# Altium PCB 32X35雷达微动底板V0.3.PcbDoc
Units mil, origin at the board's own origin, x right, y up, seen from the top; angles counter-clockwise.
Board outline 1258.74 x 1380 mil, 2 copper layers (Top Layer, Bottom Layer); 55 components, 39 nets, 182 pads, 44 vias.
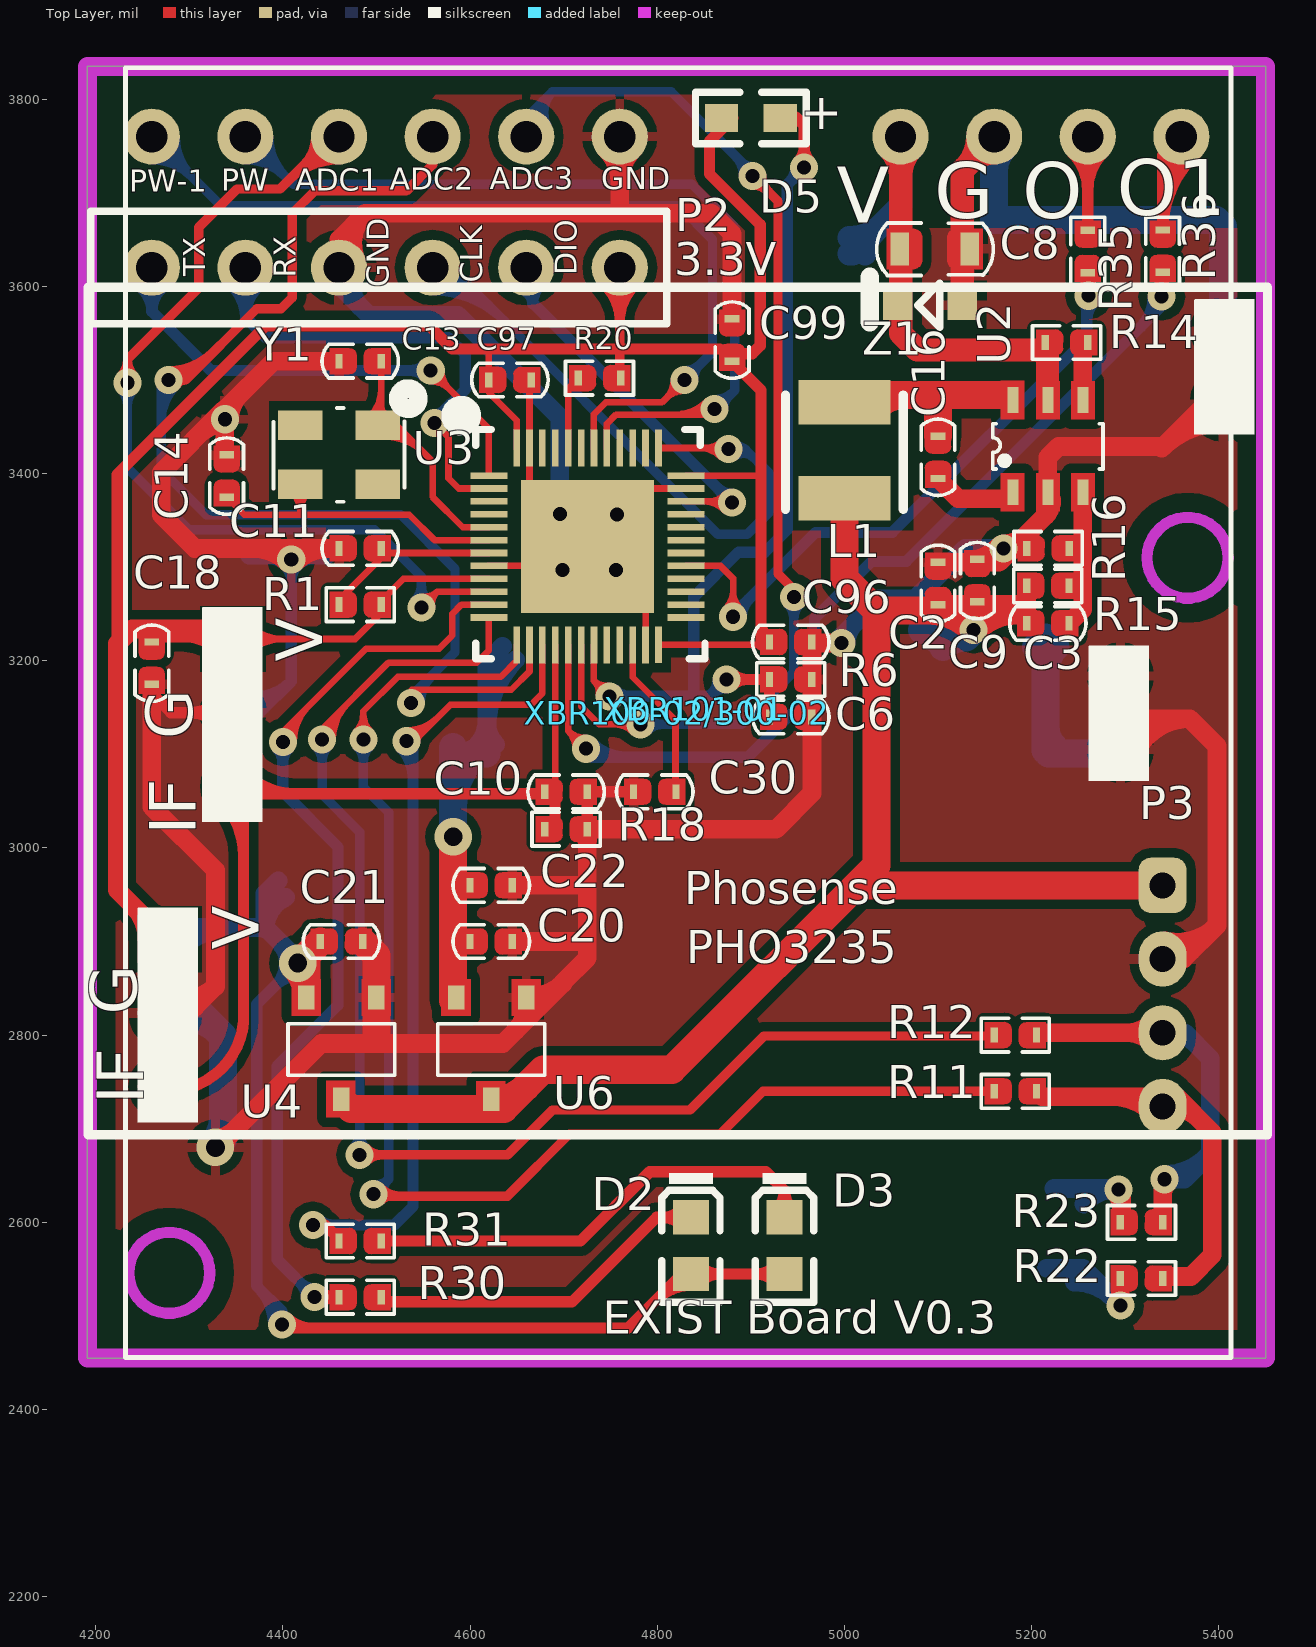
[diagram p0: Top Layer view]
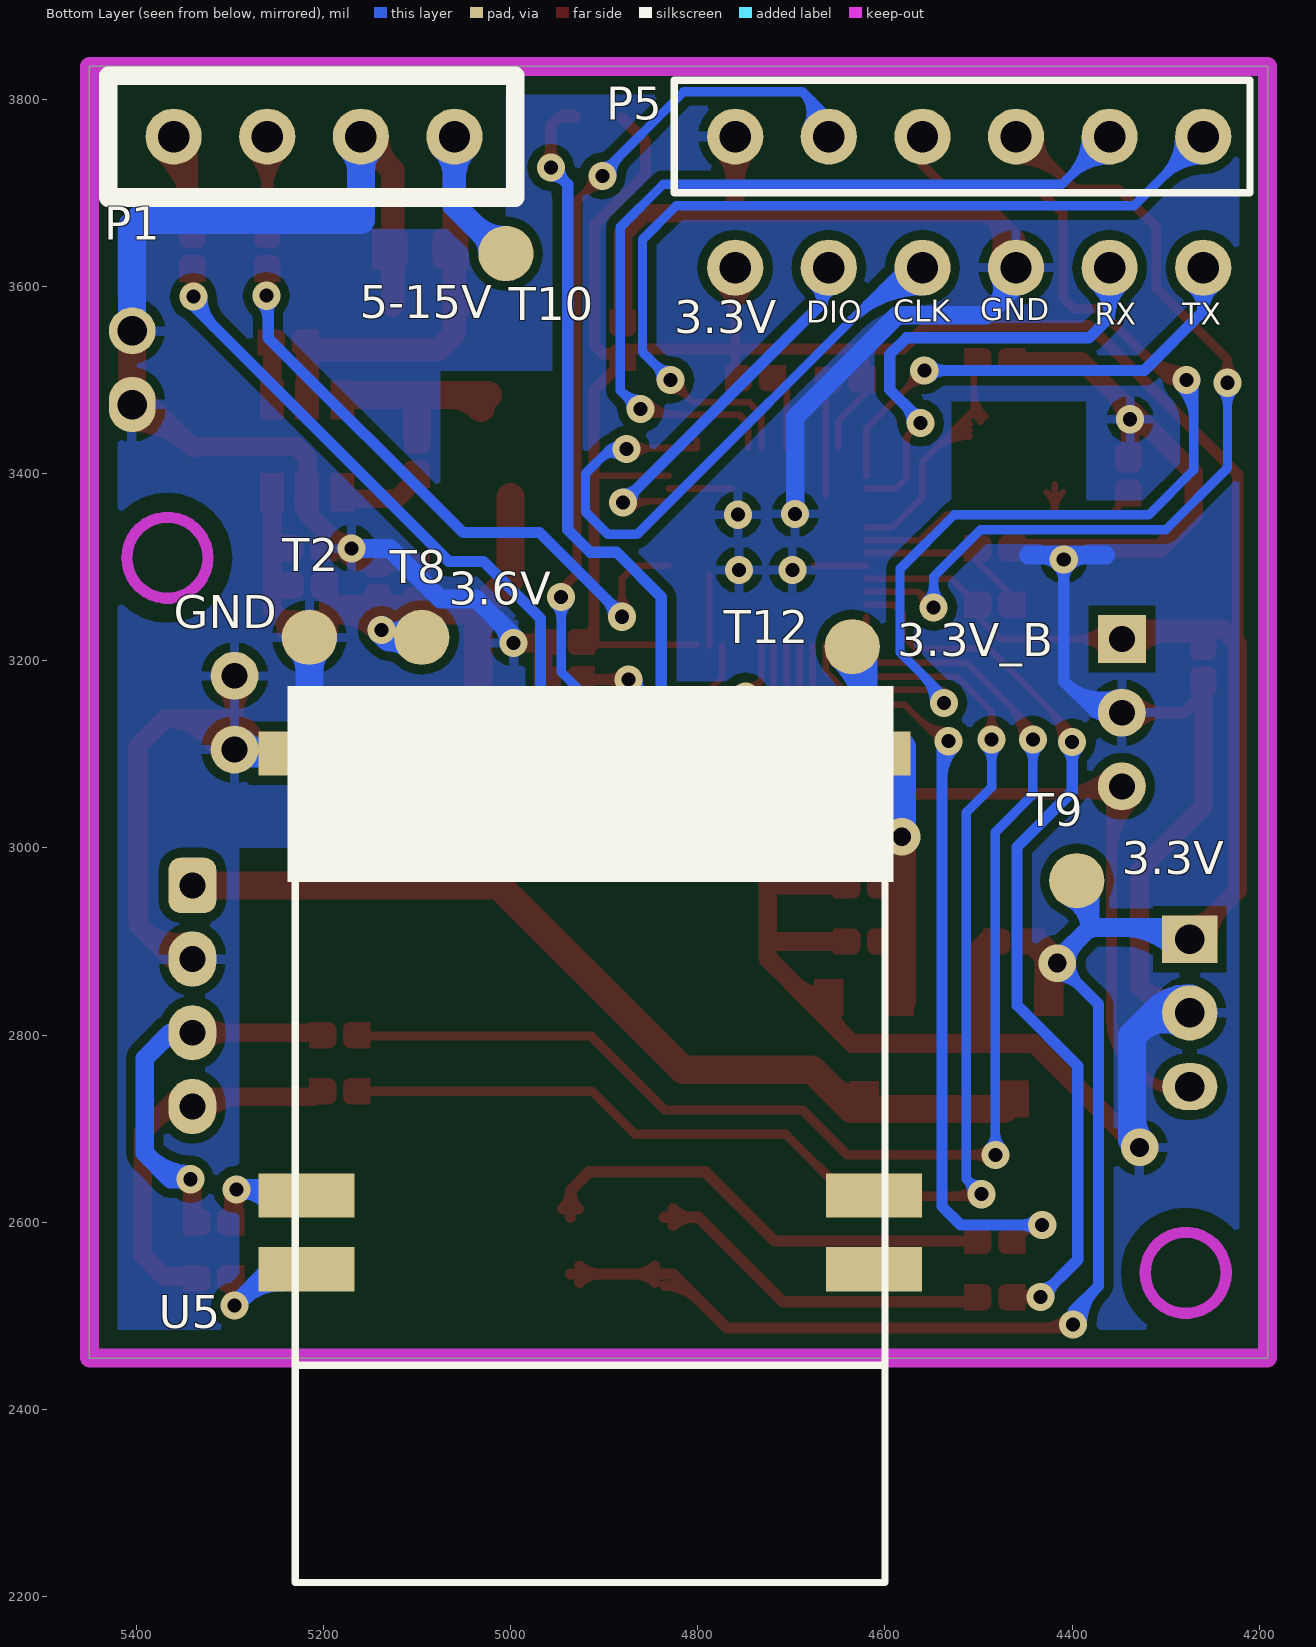
[diagram p1: Bottom Layer view, seen from below]

## Layer stack, top to bottom
Top Layer: signal copper 1.4
Dielectric: dielectric 12.6, FR-4, Dk 4.8
Bottom Layer: signal copper 1.4

## Board outline
4191.26,3835 5450,3835 5450,2455 4191.26,2455 4191.26,3835

## Design rules (kind name [scope] priority, off if disabled: settings)
Clearance Clearance_1 [InNet('GND') vs OnLayer('Keep-Out Layer')] p1: gap=6
Clearance [All] p2: gap=6
ComponentClearance [All] p1: gap=10 collisioncheckmode=3 verticalgap=10
PolygonConnect [All] p1: connectstyle=Relief reliefconductorwidth=10 reliefentries=4 polygonreliefangle="90 Angle"
RoutingVias [All] p1: holewidth=28 width=50 viastyle="Through Hole" minholewidth=15 minwidth=30 maxholewidth=28 maxwidth=50
SolderMaskExpansion [All] p1: expansion=4
TestPointUsage [All] p1: valid=0 allowmultiple=FALSE
Testpoint [All] p1: side=15 testpointundercomponent=TRUE minsize=40 maxsize=100 preferedsize=60 minholesize=0 maxholesize=40 preferedholesize=32 testpointgrid=1 style=1023 order=0-112345678
Width [All] p1: maxlimit=90 minlimit=7 preferedwidth=10
18 further rules are at their usual default settings.

## Components (designator, comment, footprint, x,y, rotation, side; value= is the part's Value field where it differs from the comment)
C2 "10uF" C0402 5100,3260 r90 top
C3 "22pF" C0402 5240,3240 r180 top
C6 "0.1uF" C0402 4920,3140 r0 top
C8 "10uF/16V" C0603 5060,3640 r0 top
C9 "10uF" C0402 5142,3263 r90 top
C10 "100nF" C0402 4680,3060 r0 top
C11 "100nF" C0402 4460,3320 r0 top
C13 "12pF" C0402 4460,3520 r0 top
C14 "12pF" C0402 4340,3420 r270 top
C16 "0.1uF" C0402 5100,3440 r270 top
C18 "10uF/6.3V" C0402 4260,3220 r270 top
C20 "10uF" C0402 4600,2900 r0 top
C21 "10uF" C0402 4440,2900 r0 top
C22 "0.1uF" C0402 4600,2960 r0 top
C30 "100nF" C0402 4820,3060 r180 top
C96 "0.1uF/50V" C0402 4920,3220 r0 top
C97 "0.1uF/50V" C0402 4620,3500 r0 top
C99 "0.1uF/50V" C0402 4880,3520 r90 top
D2 "红灯" LC-0603_LED_S1 4836,2575 r270 top
D3 "绿灯" LC-0603_LED_S1 4936,2575 r270 top
D5 "PT19-21C" LED-0603 4900,3780 r180 top
L1 "PRS3015-100MT" PRS3015 5000,3480 r270 top
P1 "DIP1X4-2.54mm" DIP1X4-2.54mm 5060,3760 r0 bottom
P2 "DIP1X6-2.54mm" DIP1X6-2.54 4760,3620 r180 top
P3 "PH2.0-4P" PH2.0-5P 5340,2960 r270 top
P5 "DIP1X6-2.54mm" DIP1X6-2.54 4260,3760 r0 bottom
R1 "4.7KΩ" R0402 4460,3260 r0 top
R6 "47k" R0402 4920,3180 r0 top
R11 "1k" R0402 5160,2740 r0 top
R12 "1k" R0402 5160,2800 r0 top
R14 "47k" R0402 5260,3540 r180 top
R15 "25.5k" R0402 5240,3280 r180 top
R16 "5.1k" R0402 5195,3320 r0 top
R18 "47k" R0402 4680,3020 r0 top
R20 "4.7K" R0402 4761,3502 r180 top
R22 "1k" R0402 5340,2540 r180 top
R23 "1k" R0402 5340,2600 r180 top
R30 "1KΩ" R0402 4460,2520 r0 top
R31 "1KΩ" R0402 4460,2580 r0 top
R35 "100R" R0402 5260,3660 r270 top
R36 "100R" R0402 5340,3615 r90 top
T2 "" TestPoints 5220,3220 r180 bottom
T8 "" TestPoints 5100,3220 r180 bottom
T9 "" TestPoints 4400,2960 r180 bottom
T10 "" TestPoints 5000,3640 r0 bottom
T12 "" TestPoints 4640,3220 r270 bottom
U2 "SY8120B1ABC" SOT-23-6 5180,3380 r90 top
U3 "HC32F460JEUA-QFN48TR" QFN48-5X5mm 4621,3322 r0 top
U4 "ME6216A30M3G" SOT-23-L 4500,2840 r270 top
U5 "BT3L" ZS3L 4600,3160 r0 bottom
U6 "ME6216A30M3G" SOT-23-L 4660,2840 r270 top
XBR100-02/300-02 "DIP1X3-2.0mm" XBR100-02 4280,3220 r90 top
XBR101-01 "DIP1X3-2.54mm" XBR101-01 4280,2760 r180 top locked
Y1 "8MHZ-1C208000CE0R" OSC-SMD_3225 4460,3420 r180 top
Z1 "SESD3Z15C" SOD323 5045,3580 r0 top

## Footprints (in the part's own frame and the unit in brackets; to place one, negate y for a bottom-side part, rotate by r counter-clockwise, add the part's x,y. Pads: shape width x height; smd on the part's side, far side on the other; paste and mask are expansions set on the pad)
C0402 [mm]
  rect 0.2x0.4 smd: 1(0,0) 2(1.15,0)
  Top Layer region: -0.252,0.352 -0.252,-0.351 0.276,-0.355 0.354,-0.34 0.421,-0.295 0.465,-0.229 0.481,-0.151 0.477,-0.151 0.481,0.152 0.465,0.23 0.421,0.296 0.354,0.34 0.276,0.356 0.276,0.352
  Top Layer region: 1.402,-0.352 1.402,0.351 0.874,0.355 0.796,0.34 0.729,0.295 0.685,0.229 0.669,0.151 0.673,0.151 0.669,-0.152 0.685,-0.23 0.729,-0.296 0.796,-0.34 0.874,-0.356 0.874,-0.352
  silkscreen extent -0.46,-0.46 1.61,0.46, body extent 0.08,-0.3 1.08,0.3, height 0.2
C0603 [mil]
  rect 19.8x35.55 smd: 1(-0.92,0) 2(74,0)
  Top Layer region: 13.34,-21.73 14.89,-21.61 16.39,-21.25 17.82,-20.66 19.14,-19.85 20.32,-18.84 21.33,-17.66 22.14,-16.34 22.73,-14.91 23.09,-13.4 23.21,-11.86 23.18,-11.86 23.21,11.88 23.09,13.43 22.73,14.93 22.14,16.36 21.33,17.68 20.32,18.86 19.14,19.87 17.82,20.68 16.39,21.27 14.89,21.63 13.34,21.75 13.34,21.72 -14.73,21.72 -14.73,-21.7
  Top Layer region: 59.72,-21.73 58.17,-21.61 56.67,-21.25 55.24,-20.66 53.92,-19.85 52.74,-18.84 51.73,-17.66 50.92,-16.34 50.33,-14.91 49.97,-13.4 49.85,-11.86 49.88,-11.86 49.85,11.88 49.97,13.43 50.33,14.93 50.92,16.36 51.73,17.68 52.74,18.86 53.92,19.87 55.24,20.68 56.67,21.27 58.17,21.63 59.72,21.75 59.72,21.72 87.79,21.72 87.79,-21.7
  silkscreen extent -25,-28 99,28, body extent 6,-15 68,16, height 12
DIP1X4-2.54mm [mil]
  round 60 hole 33.46: 1(0,0) 2(100,0) 3(200,0) 4(300,0)
  silkscreen extent -65,-65 370,65
DIP1X6-2.54 [mil]
  round 60 hole 33.46: 1(0,0) 2(100,0) 3(200,0) 4(300,0) 5(400,0) 6(500,0)
  silkscreen extent -50,-60 565,60
LC-0603_LED_S1 [mm]
  rect 0.93x0.98 smd: A(0.77,0) K(-0.77,0)
  silkscreen extent -1.97,-0.79 1.54,0.79, body extent -0.8,-0.4 0.8,0.4, height 0.6
LED-0603 [mm]
  rect 0.9x0.762 smd: 1(-0.8,0) 2(0.8,0)
  silkscreen extent -1.5,-0.7 1.5,0.7
OSC-SMD_3225 [mm] "OSC-SMD-3225"
  rect 1.2x0.8 smd: 1(-1.05,-0.8) 2(1.05,-0.8) 3(1.05,0.8) 4(-1.05,0.8)
  silkscreen extent -1.98,-1.37 1.78,1.27
PH2.0-5P [mm]
  rrect50% 1.5x1.3 hole 0.7: 1(0,0)
  oval 1.5x1.3 hole 0.7: 2(2,0) 3(4,0) 4(6,0)
PRS3015 [mm]
  rect 1.2x2.5 smd: 1(0.1,0) 2(2.7,0)
  silkscreen extent -0.1,-1.6 3,1.6, body extent -0.1,-1.5 2.9,1.5, height 1.5
QFN48-5X5mm [mm] "QFN48-5X5mm"
  rect 1x0.18 smd: 1(-0.02,1.925) 2(-0.02,1.575) 3(-0.02,1.225) 4(-0.02,0.875) 5(-0.02,0.525) 6(-0.02,0.175) 7(-0.02,-0.175) 8(-0.02,-0.525) 9(-0.02,-0.875) 10(-0.02,-1.225) 11(-0.02,-1.575) 12(-0.02,-1.925) 25(5.33,-1.925) 26(5.33,-1.575) 27(5.33,-1.225) 28(5.33,-0.875) 29(5.33,-0.525) 30(5.33,-0.175) 31(5.33,0.175) 32(5.33,0.525) 33(5.33,0.875) 34(5.33,1.225) 35(5.33,1.575) 36(5.33,1.925)
  rect 0.18x1 smd: 13(0.73,-2.675) 14(1.08,-2.675) 15(1.43,-2.675) 16(1.78,-2.675) 17(2.13,-2.675) 18(2.48,-2.675) 19(2.83,-2.675) 20(3.18,-2.675) 21(3.53,-2.675) 22(3.88,-2.675) 23(4.23,-2.675) 24(4.58,-2.667) 37(4.58,2.675) 38(4.23,2.675) 39(3.88,2.675) 40(3.53,2.675) 41(3.18,2.675) 42(2.83,2.675) 43(2.48,2.675) 44(2.13,2.675) 45(1.78,2.675) 46(1.43,2.675) 47(1.08,2.675) 48(0.73,2.675)
  rect 3.6x3.6 smd: 49(2.655,0)
  silkscreen extent -1.07,-3.05 5.84,3.7
R0402 [mm]
  rect 0.2x0.4 smd: 1(0,0) 2(1.15,0)
  Top Layer region: 1.402,-0.352 1.402,0.351 0.874,0.355 0.796,0.34 0.729,0.295 0.685,0.229 0.669,0.151 0.673,0.151 0.669,-0.152 0.685,-0.23 0.729,-0.296 0.796,-0.34 0.874,-0.356 0.874,-0.352
  Top Layer region: -0.252,0.352 -0.252,-0.351 0.276,-0.355 0.354,-0.34 0.421,-0.295 0.465,-0.229 0.481,-0.151 0.477,-0.151 0.481,0.152 0.465,0.23 0.421,0.296 0.354,0.34 0.276,0.356 0.276,0.352
  silkscreen extent -0.35,-0.46 1.5,0.46, body extent 0.12,-0.26 1.12,0.24, height 0.35
SOD323 [mm]
  rect 0.8x0.8 smd: A(2.06,0) K(0.3,0)
  silkscreen extent 0.84,-0.6 1.44,0.6, body extent -0.17,-0.62 2.53,0.63, height 1.1
SOT-23-6 [mm]
  rect 0.7x0.3 smd: 1(0,0) 2(0,-0.95) 3(0,-1.9) 4(2.5,-1.9) 5(2.5,-0.95) 6(2.5,0)
  Top Layer region: -0.526,-0.313 0.527,-0.313 0.527,0.34 -0.526,0.34
  Top Layer region: -0.527,-1.276 0.526,-1.276 0.526,-0.623 -0.527,-0.623
  Top Layer region: -0.527,-2.226 0.526,-2.226 0.526,-1.573 -0.527,-1.573
  Top Layer region: 1.974,-0.313 3.027,-0.313 3.027,0.34 1.974,0.34
  Top Layer region: 1.972,-1.276 3.025,-1.276 3.025,-0.623 1.972,-0.623
  Top Layer region: 1.972,-2.226 3.025,-2.226 3.025,-1.573 1.972,-1.573
  silkscreen extent 0.63,-2.45 1.86,0.54, body extent -0.16,-2.39 2.64,0.51, height 1.45
SOT-23-L [mm]
  rect 0.65x0.45 smd: 1(0,0) 2(0,-1.9) 3(2.757,-0.95)
  Top Layer region: 2.254,-1.366 3.257,-1.366 3.257,-0.563 2.254,-0.563
  Top Layer region: -0.501,-2.306 0.502,-2.306 0.502,-1.503 -0.501,-1.503
  Top Layer region: -0.501,-0.401 0.502,-0.401 0.502,0.402 -0.501,0.402
  silkscreen extent 0.71,-2.4 2.11,0.5, body extent 0.17,-2.44 2.67,0.56, height 1.05
TestPoints [mil] "TestPoints"
  round 59.06 smd: 1(5,5)
XBR100-02 [mm] "XBR100-02"
  rect 1.3x1.3 hole 0.7: 1(0.082,-1.699)
  round 1.3 hole 0.7: 2(-2.918,-25.779) 2(-1.918,-1.699) 2(-0.918,-25.779) 3(-3.918,-1.699)
  Top Overlay keep-out lines w0.127: -19.418,1.221 15.582,1.221 15.582,-28.779 -19.418,-28.779 -19.418,1.221
  silkscreen extent -19.42,-28.78 15.58,1.22
XBR101-01 [mm] "XBR101-01"
  rect 1.5x1.3 hole 0.8: 1(0.144,-3.618)
  oval 1.27x1.5 hole 0.8: 2(-28.558,-18.128)
  round 1.27 hole 0.8: 2(-28.558,-20.128)
  round 1.5 hole 0.8: 2(0.144,-1.618)
  oval 1.5x1.27 hole 0.8: 3(0.144,0.382)
  Top Layer lines w0.406: 0.294,0.127 0.652,0.485 -0.15,0.485
  Top Overlay keep-out lines w0.254: 2.229,1.69 2.229,-21.31 -29.771,-21.31 -29.771,1.69 2.229,1.69
  silkscreen extent -29.77,-21.31 2.23,1.69, body extent -29.56,-21.13 0.39,0.63, height 5.5
ZS3L [mm]
  rect 2.6x1.2 smd: 1(0.3,15.5) 2(0.3,13.5) 9(15.7,1.5) 15(15.7,13.5) 16(15.7,15.5)
  rect 2.295x1.2 smd: 8(0.452,1.5)
  silkscreen extent 0,0 16,24

## Part data
C2 C3 C6 C8 C9 C10 C16 C20 C21 C22 C30: library part Cap, "Capacitor"
C11: library part "0402 100nF (104) 10% 16V", "贴片电容"
C13 C14: library part "0402 22pF (220) 5% 50V", "贴片电容"
C18 C96 C97 C99: library part "0402 2.2nF (222) 10% 50V", "贴片电容"
D2 D3: library part "0603 红灯", "发光二极管"
D5: library part "Photo Sen", "Photosensitive Diode"
L1: library part Inductor, "Inductor"
P1: library part DIP4-2.54mm
P3: library part "Header 4", "Header, 4-Pin"
R1 R35 R36: library part "0402 4.7KΩ (4701) 1%", "贴片电阻"
R6 R11 R12 R14 R15 R16 R18 R20 R22 R23: library part Res2, "Resistor"
R30 R31: library part "0402 1KΩ (1001) 1%", "贴片电阻"
T2 T8 T9 T10 T12: library part TestPoints, "TestPoints"
U2: library part H9108
U3: library part HC32F460JETA-LQFP48
U4 U6: library part SSP6206
XBR100-02/300-02: library part DIP1X3-2.54mm
Y1: library part "SMD-3225_4P  25MHZ 12PF 10PPM", "贴片晶振"
Z1: library part "D Zener", "Zener Diode"

## Via types
v1: diameter 30, hole 15, Top Layer to Bottom Layer, 41 vias
v2: diameter 40, hole 20, Top Layer to Bottom Layer, 3 vias

## Nets (pads, with @x,y where several pads share a name; then routed paths per layer and width w, separated by ;. In a path a pad name is that pad's centre, name@x,y a point inside that pad or via, vN(x,y) a via of type N, cw(c..) or ccw(c..) an arc to the next point about the centre after c; other vN are vias at no path point)
3.3V: C18.1 C21.1 C96.1 C97.1 C99.1 D2.A D3.A D5.2 P2.1 R1.2 R20.1 T9.1 U3.9 U3.24 U3.36 U3.48 U4.2 XBR100-02/300-02.1 XBR101-01.1 | length 5107.6
  Top Layer w7: C18.1@4258,3222 4259.24,3223.24 4477.24,3223.24 4503,3249 R1.2@4503,3260 ; C18.1@4264.25,3219.69 cw(c4272.81,3211.12) 4272.81,3223.24 ; XBR100-02/300-02.1@4331.26,3207.62 ccw(c4293.55,3169.91) 4293.55,3223.24 ccw(c4293.55,3276.57) XBR100-02/300-02.1@4331.26,3238.86 ; XBR100-02/300-02.1@4336.21,3212.57 ccw(c4310.45,3186.81) 4310.45,3223.24 ccw(c4310.45,3259.67) XBR100-02/300-02.1@4336.21,3233.91 ; XBR100-02/300-02.1@4357.55,3212.57 cw(c4383.31,3186.81) 4383.31,3223.24 cw(c4383.31,3259.67) XBR100-02/300-02.1@4357.55,3233.91 ; XBR100-02/300-02.1@4362.5,3207.62 cw(c4400.21,3169.91) 4400.21,3223.24 cw(c4400.21,3276.57) XBR100-02/300-02.1@4362.5,3238.86 ; 4501.14,3247.14 ccw(c4492.23,3256.06) R1.2@4504.84,3256.06 ; 4503,3249.51 cw(c4511.82,3249.51) R1.2@4505.58,3255.75 ; R1.2@4503.32,3261.95 4528.93,3287.55 U3.9 ; 4620,3513.86 4620,3533 ; 4620.47,3486.1 4649.74,3456.83 U3.48 ; U3.24 4911,3217 ; U3.36 4904,3397.79 ; C96.1@4917,3217 C96.1
  Top Layer w10: P2.1@4742.32,3602.32 cw(c4699.64,3559.64) 4760,3559.64 cw(c4820.36,3559.64) P2.1@4777.68,3602.32 ; P2.1@4749.39,3609.39 cw(c4723.79,3583.79) 4760,3583.79 cw(c4796.21,3583.79) P2.1@4770.61,3609.39 ; R20.1@4760,3503 P2.1
  Top Layer w12: 4223,3203 4223,3399 4382,3558 4556,3558 4581,3533 4867,3533 ; C18.1@4258,3222 C18.1 ; v1@4399,2487 4769,2487 4826.68,2544.68 D3.A ; v1@4405.36,2497.36 ccw(c4430.38,2522.38) 4430.38,2487 ; 4799.78,2517.78 cw(c4835.02,2482.55) D2.A@4835.02,2532.38 ; D2.A@4845.69,2535.98 cw(c4866.7,2514.97) 4866.7,2544.68 cw(c4866.7,2574.4) D2.A@4845.69,2553.39 ; C99.1 4911,3489 4911,3217 ; D5.2@4881,3780 4856,3755 4856,3720 4910,3666 4910,3536.57 4901.43,3528 4882,3528 ; C99.1@4882.48,3521.46 cw(c4898.27,3505.67) 4898.27,3528 ; 4911,3240.68 ccw(c4936.75,3240.68) C96.1@4918.54,3222.48 ; D3.A@4926.31,2535.98 ccw(c4905.3,2514.97) 4905.3,2544.68 ccw(c4905.3,2574.4) D3.A@4926.31,2553.39
  Top Layer w20: 4240.13,2937.87 cw(c4204.69,2902.44) XBR101-01.1@4254.8,2902.44 ; XBR101-01.1@4252.6,2925.4 ccw(c4270.39,2943.2) XBR101-01.1@4270.39,2918.03 ; XBR101-01.1 4274.33,2903.67 4223,2955 4223,3218 4239,3234 XBR100-02/300-02.1@4338,3234 ; 4283.27,3234 cw(c4283.27,3159.62) XBR100-02/300-02.1@4335.86,3212.22
  Top Layer w30: v2@4412.46,2873.46 cw(c4381.73,2842.73) U4.2@4425.2,2842.73 ; U4.2 4425.2,2885.2 C21.1
  Bottom Layer w12: 4373.74,2530.26 cw(c4334.47,2491) v1@4390,2491 ; 4394.22,2509.78 cw(c4375.44,2491) v1@4402,2491 ; v1(4399,2491) 4399,2505 4372,2532 4372,2833 v2(4416,2877) ; v2@4402,2877 cw(c4368.2,2877) 4392.1,2853.1 cw(c4416,2829.2) v2@4416,2863
  Bottom Layer w20: XBR101-01.1 4286.89,2915 4381,2915 ; XBR101-01.1@4289.29,2891.42 cw(c4346.23,2834.48) 4346.23,2915 ; 4381,2913.08 cw(c4418.44,2913.08) T9.1@4403.03,2947.2 ; T9.1 4381,2951 4381,2915 ; 4396.81,2899.19 cw(c4374.62,2877) v2@4406,2877 ; v2@4416,2880 4381,2915
3.3V_BLUE: C20.1 C22.1 T12.1 U5.8 U6.2 | length 640.6
  Top Layer w30: U6.2@4582,2837 v2(4582,3012)
  Bottom Layer w12: T12.1@4617.81,3197.81 T12.1
  Bottom Layer w20: U5.8@4608.18,3110.58 ccw(c4584.92,3133.83) 4617.81,3133.83 ccw(c4650.7,3133.83) U5.8@4627.44,3110.58 ; U5.8 T12.1@4617.81,3197.81 ; 4617.81,3126.36 cw(c4723.64,3126.36) T12.1@4648.81,3201.19 ; 4617.81,3174.64 cw(c4675.36,3174.64) T12.1@4634.67,3215.33
  Bottom Layer w30: v2(4582,3012) U5.8@4582,3108 ; 4582,3045.72 cw(c4651.47,3045.72) U5.8@4602.35,3094.85 ; U5.8@4603.94,3100.94 U5.8
3.6V: C2.1 C3.2 C9.1 L1.2 P3.1 R15.2 T8.1 U4.3 U6.3 | length 1982
  Top Layer w20: C2.1 5193.72,3260 5194.72,3261 ; C3.2 R15.2
  Top Layer w30: U4.3 4473.06,2721 4636,2721 4678,2763 4816,2763 5034.14,2981.14 5034.14,3253.86 ; U6.3@4622.6,2729.25 ccw(c4622.6,2781.53) 4659.56,2744.56 ; L1.2@5000,3375 5000,3288 5034.14,3253.86 ; 5013,2960 P3.1 ; 5087.64,3253.86 cw(c5087.64,3182.64) v1(5138,3233) cw(c5184.8,3190.93) 5184.8,3253.86 5034.14,3253.86
  Bottom Layer w30: T8.1@5082.86,3233 T8.1@5088,3233 ; T8.1 v1@5130,3225 ; T8.1@5105.29,3214.74 cw(c5130,3190.11) v1@5130,3225 ; T8.1@5105.29,3235.26 ccw(c5130,3259.89) v1@5130,3225 ; T8.1@5118.69,3225 ccw(c5118.69,3252.31) v1(5138,3233) v1@5130,3225
5-15V: C8.1 P1.1 R14.2 T10.1 U2.5 Z1.K | length 786.8
  Top Layer w25: P1.1@5047.63,3747.63 cw(c5017.75,3717.75) 5060,3717.75 cw(c5102.25,3717.75) P1.1@5072.37,3747.63 ; Z1.K@5054.51,3577.7 cw(c5041.27,3564.46) Z1.K@5060,3564.46 ; Z1.K@5054.51,3582.3 ccw(c5041.27,3595.54) Z1.K@5060,3595.54 ; P1.1 5060,3550 5078,3532 5209.3,3532 5217,3524.3 U2.5@5217,3492
  Bottom Layer w25: T10.1 5009,3635 5060,3686 P1.1 ; T10.1@5005,3652.03 ccw(c5005,3702.79) 5040.9,3666.9 ; T10.1@5022.03,3635 cw(c5053.48,3635) 5031.24,3657.24 ; P1.1@5047.63,3747.63 cw(c5017.75,3717.75) 5060,3717.75 cw(c5102.25,3717.75) P1.1@5072.37,3747.63
AD: C10.1 R18.1 U3.16 XBR100-02/300-02.3 XBR101-01.3 | length 1133.3
  Top Layer w7: C10.1@4680,3058 4691.08,3069.08 U3.16 ; C10.1@4680,3064.37 ccw(c4680,3079.76) 4690.88,3068.88
  Top Layer w12: XBR101-01.3@4273.99,2740.64 ccw(c4277.45,2821.45) 4358,2814 XBR100-02/300-02.3@4358,3046.27 ; XBR100-02/300-02.3@4333.03,3051.91 cw(c4272.74,2991.62) 4358,2991.62 ; XBR100-02/300-02.3@4341.51,3060.39 cw(c4301.72,3020.59) 4358,3020.59 ; XBR100-02/300-02.3@4352.25,3071.13 ccw(c4383.94,3102.82) 4383.94,3058 ; XBR100-02/300-02.3@4358,3046 cw(c4369.47,3046.27) XBR100-02/300-02.3@4369.2,3057.73 ; XBR100-02/300-02.3@4360.73,3051.91 cw(c4375.44,3037.2) 4375.44,3058 ; XBR100-02/300-02.3@4360.73,3079.61 ccw(c4412.91,3131.79) 4412.91,3058 ; XBR100-02/300-02.3@4369.47,3058 C10.1@4680,3058 ; R18.1 4690.88,3030.88 4690.88,3068.88
ADC1: P5.3 U3.10 | length 1229.9
  Top Layer w7: v1(4548,3257) 4564.77,3273.77 ; v1@4549.35,3268.42 ccw(c4551.54,3287) 4564.77,3273.77 ; v1@4559.42,3258.35 cw(c4578,3260.54) 4564.77,3273.77 ; U3.10 4564.77,3273.77
  Top Layer w10: v1@4226.93,3504.07 ccw(c4209.86,3521.14) 4234,3521.14 ccw(c4258.14,3521.14) v1@4241.07,3504.07 ; v1(4234,3497) 4234,3522 4310,3598 4310,3663 4351,3704 4397,3704 P5.3@4453,3760 ; 4405.37,3712.37 cw(c4460,3657.75) P5.3@4460,3735 ; 4422.27,3729.27 ccw(c4391.54,3760) P5.3@4435,3760 ; 4422.44,3729.44 cw(c4460,3691.89) P5.3@4460,3745
  Bottom Layer w10: v1@4226.93,3489.93 cw(c4209.86,3472.86) 4234,3472.86 cw(c4258.14,3472.86) v1@4241.07,3489.93 ; v1(4234,3497) 4234,3406 4300,3340 4498,3340 4548,3290 v1(4548,3257) ; v1@4540.93,3264.07 ccw(c4523.86,3281.14) 4548,3281.14 ccw(c4572.14,3281.14) v1@4555.07,3264.07
ADC2: P5.4 U3.14 | length 1455.2
  Top Layer w7: v1(4537,3155) 4538,3169 4644,3169 4663.52,3188.52 U3.14
  Top Layer w10: v1@4278,3510 ccw(c4278,3577.6) 4325.8,3529.8 ; v1@4286.49,3494.72 cw(c4296,3488.8) 4296,3500 ; v1@4286.49,3505.28 ccw(c4296,3511.2) 4296,3500 ; 4308.73,3512.73 cw(c4278,3543.46) v1(4278,3500) 4296,3500 ; P5.4 4560,3730 4532,3702 4434,3702 4410,3678 4410,3588 4398,3576 4372,3576 4296,3500
  Bottom Layer w10: 4270,3456.54 cw(c4321.46,3456.54) v1@4285.07,3492.93 ; 4270,3480.69 cw(c4297.31,3480.69) v1(4278,3500) ; v1@4270,3499 4270,3404 4318,3356 4526,3356 4584,3298 4584,3209 4537,3162 v1(4537,3155) ; v1@4547,3155 cw(c4588.04,3155) 4559.02,3184.02
ADC3: P5.5 U3.18 | length 1453.5
  Top Layer w7: U3.18 4718.64,3151.36 4738,3132 v1(4782,3132) ; v1@4773.87,3123.87 ccw(c4754.24,3104.24) 4754.24,3132 ccw(c4754.24,3159.76) v1@4773.87,3140.13
  Top Layer w10: v1@4902,3708 cw(c4902,3683.86) 4919.07,3700.93 cw(c4936.14,3718) v1@4912,3718 ; v1(4902,3718) 4929,3691 4929,3293 4946,3276 v1(4946,3268)
  Bottom Layer w10: P5.5 4660,3780 4688,3808 ; P5.5@4673.35,3766.84 cw(c4697.41,3779.17) 4678.29,3798.29 ; P5.5@4682.25,3771.4 cw(c4710.24,3785.75) 4688,3808 ; v1(4782,3132) 4890,3132 4946,3188 v1(4946,3268) ; v1@4789.07,3124.93 cw(c4806.14,3107.86) 4806.14,3132 cw(c4806.14,3156.14) v1@4789.07,3139.07 ; 4882.81,3740.19 cw(c4860.62,3718) v1@4892,3718 ; 4890.05,3732.95 ccw(c4902,3744.9) v1@4902,3728 ; v1@4904,3719 4815,3808 4688,3808 ; v1@4938.93,3260.93 cw(c4921.86,3243.86) 4946,3243.86 cw(c4970.14,3243.86) v1@4953.07,3260.93
GND: C2.2 C6.2 C8.2 C9.2 C10.2 C11.1 C13.1 C14.1 C18.2 C20.2 C21.2 C22.2 C30.2 C96.2 C97.2 C99.2 P1.2 P2.4 P3.2 P5.6 R6.2 R16.1 R18.2 T2.1 U2.2 U3.8 U3.23 U3.35 U3.47 U3.49 U4.1 U5.9 U6.1 XBR100-02/300-02.2 XBR101-01.2 Z1.A | length 8271.4
  Top Layer w7: U3.8 U3.49@4675.33,3301.33 ; U3.49@4663.52,3377.48 C97.2@4663.52,3498.24 ; 4663.52,3490.77 cw(c4670.57,3490.77) C97.2@4665.58,3495.75 ; U3.49@4764.01,3384.01 U3.35 ; U3.23 U3.49@4787.54,3291.46
  Top Layer w12: 4260,3164.78 4280.28,3144.5 XBR100-02/300-02.2@4346.88,3144.5 ; XBR100-02/300-02.2@4333.03,3130.65 ccw(c4299.59,3097.2) 4299.59,3144.5 ccw(c4299.59,3191.8) XBR100-02/300-02.2@4333.03,3158.35 ; R18.2 C10.2 C30.2
  Top Layer w20: C18.2@4259.99,3177.34 4259.99,3044.01 4328,2976 4328,2852 ; XBR101-01.2@4274.16,2823.26 ccw(c4284.83,2851.41) 4306.12,2830.12 ; XBR101-01.2@4274.33,2823.7 4299.7,2823.7 4328,2852 ; XBR101-01.2@4281.25,2841.96 ccw(c4296.86,2883.14) 4328,2852 ; 4310.69,3441.69 cw(c4338,3414.37) v1@4338,3453 ; v2@4328,2690 ccw(c4328,2718.97) 4348.49,2698.49 ; v2@4329,2679 4441,2791 4635,2791 4699.22,2855.22 ; v2@4338,2680 cw(c4357.31,2680) 4343.66,2693.66 ; C14.1@4338,3417 v1@4338,3468 ; v1@4343,3458 cw(c4379.21,3458) 4353.61,3483.61 ; 4367.96,3320 cw(c4367.96,3266.96) v1@4405.46,3304.46 ; v1@4412.54,3304.46 cw(c4450.04,3266.96) 4450.04,3320 ; C11.1 4306,3320 4270,3356 4270,3401 4337,3468 v1@4338,3468 ; C13.1 4390,3520 v1@4338,3468 ; 4467.13,3657.13 ccw(c4490.96,3633.3) P2.4 4460,3650 4488,3678 ; P2.4@4478.38,3627.9 cw(c4520.15,3645.85) 4488,3678 ; C20.2 4724.28,2900 ; C22.2 4723.28,2960 ; 4647.76,2803.76 ccw(c4615.46,2836.06) U6.1@4661.14,2836.06 ; U6.1@4659.8,2842.81 ccw(c4667.61,2886.84) 4699.22,2855.22 ; P5.6@4745.86,3745.86 cw(c4711.72,3711.72) 4760,3711.72 cw(c4808.28,3711.72) P5.6@4774.14,3745.86 ; 4760,3678 P5.6 ; C99.2 4880,3656 4858,3678 4488,3678 ; C96.2@4964,3219 v1(4997,3219) ; C96.2 4965.28,3058.28 4927,3020 R18.2 4725.28,2882.28 4699.22,2856.22 4699.22,2855.22 ; C2.2 5165.28,3305.28 5217.4,3357.4 5217.4,3417.4 5229,3429 5341,3429 XBR101-01.2@5404.33,3492.33 ; 5122.38,3305.28 ccw(c5122.38,3367.62) v1@5166.46,3323.54 ; v1@5170,3325 ccw(c5170,3361.21) 5195.61,3335.61 ; v1@5173.02,3313.02 cw(c5195,3291.05) R16.1@5195,3322.13 ; 5213.98,3353.98 ccw(c5195.83,3372.13) U2.2@5221.5,3372.13 ; XBR100-02/300-02.2@5272.57,3114.9 cw(c5307.87,3099.48) 5307.87,3138 ; XBR100-02/300-02.2@5283.92,3116.15 ccw(c5257.3,3142.77) 5294.94,3142.77 ccw(c5332.58,3142.77) XBR100-02/300-02.2@5305.97,3116.15 ; XBR100-02/300-02.2@5283.92,3172.85 cw(c5257.3,3146.23) 5294.94,3146.23 cw(c5332.58,3146.23) XBR100-02/300-02.2@5305.97,3172.85 ; XBR100-02/300-02.2@5290.9,3106.9 cw(c5338.43,3086.13) 5338.43,3138 ; XBR100-02/300-02.2@5294.94,3105.13 XBR100-02/300-02.2@5294.94,3183.87 ; 5294.94,3138 5369,3138 ; XBR100-02/300-02.2@5309.23,3098.89 cw(c5369,3072.77) 5369,3138 ; P3.2@5339.12,2880.88 ccw(c5346.28,2916.07) 5371.68,2890.68 ; 5339.19,3427.19 cw(c5404.33,3362.05) XBR101-01.2@5404.33,3454.17 ; P3.2 5362.26,2881.26 5398,2917 ; P3.2@5343.11,2900.47 ccw(c5355.17,2959.82) 5398,2917 ; 5373.33,3461.33 cw(c5404.33,3430.34) XBR101-01.2@5404.33,3474.17 ; 5369,3138 5398,3109 5398,2917
  Top Layer w25: Z1.A 5126.1,3724.1 5160,3758 P1.2 ; 5126.1,3619.33 cw(c5146.79,3619.33) C8.2@5132.16,3633.96 ; 5126.1,3660.67 ccw(c5146.79,3660.67) C8.2@5132.16,3646.04 ; 5128.71,3726.71 ccw(c5095.42,3760) P1.2@5142.5,3760 ; 5133.54,3731.54 cw(c5160,3705.08) P1.2@5160,3742.5
  Top Layer w30: C21.2 4500,2885.28 4500,2802 ; XBR101-01.2@5404.33,3492.33 XBR101-01.2@5404.33,3552.44
  Bottom Layer w12: XBR100-02/300-02.2@4345.67,3140.26 ccw(c4355.35,3174.03) 4380.19,3149.19 ; XBR100-02/300-02.2@4346.88,3144.5 4375.5,3144.5 4409,3178 ; XBR100-02/300-02.2@4348.97,3151.8 ccw(c4361.77,3196.42) 4394.59,3163.59 ; XBR100-02/300-02.2@4352.28,3163.33 ccw(c4368.19,3218.8) 4409,3178 ; v1@4402.64,3301.64 cw(c4387.27,3286.27) 4409,3286.27 cw(c4430.73,3286.27) v1@4415.36,3301.64 ; v1(4409,3308) 4409,3178
  Bottom Layer w20: 4364,3313 4447,3313 ; 4384.86,3313 cw(c4384.86,3283.86) v1@4405.46,3304.46 ; v1@4412.54,3304.46 cw(c4433.14,3283.86) 4433.14,3313 ; P2.4 4460,3601 4492,3569 4587,3569 4696,3460 v1(4696,3357) ; P2.4@4477.67,3610.64 ccw(c4501.83,3597.83) 4482.5,3578.5 ; v1(4997,3219) 4997,3226 5037,3266 5075,3266 5129,3320 v1(5170,3320) ; v1@5002,3219 cw(c5030.97,3219) 5010.49,3239.49
  Bottom Layer w30: XBR101-01.2@4272.98,2839.11 cw(c4276.93,2793.95) 4308.99,2826.01 ; XBR101-01.2@4274.33,2823.7 4311.3,2823.7 4336,2799 4336,2688 v2(4328,2680) ; XBR101-01.2@4281.76,2811.22 cw(c4301.92,2777.35) 4329.78,2805.22 ; XBR101-01.2@4284.6,2813.43 cw(c4309.4,2788.63) 4309.4,2823.7 cw(c4309.4,2858.77) XBR101-01.2@4284.6,2833.97 ; v2@4324.46,2683.54 ccw(c4296.62,2711.38) 4336,2711.38 ; P1.2@5149.39,3749.39 cw(c5123.79,3723.79) 5160,3723.79 cw(c5196.21,3723.79) P1.2@5170.61,3749.39 ; P1.2 5160,3671 5397,3671 5404.33,3663.67 XBR101-01.2@5404.33,3552.44 ; T2.1@5204.73,3214.73 cw(c5179.93,3189.93) 5215,3189.93 cw(c5250.07,3189.93) T2.1@5225.27,3214.73 ; U5.9@5215,3104.06 T2.1 ; 5215,3129.27 ccw(c5246.43,3129.27) U5.9@5224.21,3107.04 ; U5.9 XBR100-02/300-02.2@5290.76,3100.94 ; U5.9@5259.27,3100.94 ccw(c5259.27,3140.8) XBR100-02/300-02.2@5287.45,3112.62
  other v1: 4699,3297 4756,3297 4757,3356 4338,3458
GREEN_LED: R31.1 U3.15 | length 1024.5
  Top Layer w7: v1(4532,3114) 4540,3114 4579,3153 4665,3153 4677.3,3165.3 U3.15 ; v1@4532,3118.5 ccw(c4532,3148.68) 4553.34,3127.34 ; v1@4532,3125.5 ccw(c4532,3172.58) 4565.29,3139.29 ; v1@4543.5,3114 cw(c4551.95,3114) 4545.97,3119.97
  Top Layer w12: v1@4431.77,2599.99 cw(c4433.35,2579.29) 4448.03,2593.97 ; v1(4432,2597) 4445,2597 4460,2582 R31.1
  Bottom Layer w12: v1(4432,2597) 4519,2597 4539,2617 4539,3107 v1(4532,3114) ; v1@4438.36,2590.64 cw(c4453.73,2575.27) 4453.73,2597 cw(c4453.73,2618.73) v1@4438.36,2603.36 ; v1@4525.64,3107.64 cw(c4493.37,3075.37) 4539,3075.37
LIGHT: C6.1 D5.1 R6.1 U3.19 | length 1207.2
  Top Layer w7: U3.19 4732.42,3178.58 ; v1@4737.59,3163.45 ccw(c4719.58,3165.74) 4732.42,3178.58 ; v1@4747.55,3173.41 cw(c4745.26,3191.42) 4732.42,3178.58 ; v1(4749,3162) 4732.42,3178.58
  Top Layer w12: v1(4874,3180) R6.1 C6.1 ; v1@4880.36,3173.64 cw(c4895.73,3158.27) 4895.73,3180 cw(c4895.73,3201.73) v1@4880.36,3186.36 ; D5.1@4931,3781 4948,3781 4957,3772 v1(4957,3727) ; D5.1@4933.32,3782.87 cw(c4938.35,3766.67) 4950.34,3778.66 ; v1@4950.64,3733.36 ccw(c4935.27,3748.73) 4957,3748.73 ccw(c4978.73,3748.73) v1@4963.36,3733.36
  Bottom Layer w12: v1(4749,3162) 4856,3162 v1(4874,3180) ; v1@4755.36,3155.64 cw(c4770.73,3140.27) 4770.73,3162 cw(c4770.73,3183.73) v1@4755.36,3168.36 ; 4839,3162 4839,3268 4887,3316 4915,3316 4939,3340 4939,3709 v1(4957,3727) ; v1@4865,3180 cw(c4843.27,3180) 4858.64,3164.64 cw(c4874,3149.27) v1@4874,3171 ; v1@4948,3727 cw(c4926.27,3727) 4941.64,3711.64 cw(c4957,3696.27) v1@4957,3718
NetC3_1: C3.1 R15.1 R16.2 U2.3 | length 146.1
  Top Layer w20: C3.1 5254.79,3254.79 U2.3
NetC16_1: C16.1 L1.1 U2.6 | length 226.6
  Top Layer w30: L1.1@5024,3484 5171,3484 ; L1.1@5031.69,3469.97 cw(c5065.57,3436.09) 5065.57,3484 ; C16.1 5100,3482
NetC16_2: C16.2 U2.1 | length 79
  Top Layer w20: C16.2 5121.72,3373 5170,3373
NetC30_1: C30.1 U3.22 | length 175.8
  Top Layer w7: U3.22 4773.76,3182.24 4819.53,3136.47 4819.53,3060.47 C30.1
NetD2_K: D2.K R30.2 | length 420.1
  Top Layer w12: 4500,2515 4709,2515 4799.31,2605.31 D2.K ; D2.K@4826.31,2596.61 ccw(c4805.3,2575.6) 4805.3,2605.31 ccw(c4805.3,2635.03) D2.K@4826.31,2614.02
NetD3_K: D3.K R31.2 | length 542.6
  Top Layer w12: R31.2 4718,2580 4792,2654 4916,2654 4936,2634 ; D3.K@4927.52,2614.23 ccw(c4908.73,2634) 4936,2634 ; D3.K 4936,2634 ; D3.K@4944.48,2614.23 cw(c4963.27,2634) 4936,2634
NetP3_3: P3.3 R12.2 R23.1 | length 563
  Top Layer w20: R12.2@5207.8,2802.52 P3.3 ; P3.3@5328.98,2791.5 ccw(c5302.36,2764.88) 5302.36,2802.52 ccw(c5302.36,2840.16) P3.3@5328.98,2813.54 ; R23.1 v1@5340,2644 ; 5340,2629.1 cw(c5358.9,2629.1) v1@5345.54,2642.46
  Bottom Layer w20: P3.3@5339.48,2802.96 cw(c5344.62,2759.53) 5375.55,2790.45 ; P3.3 5363.48,2802.52 5391,2775 5391,2674 5363,2646 v1(5342,2646) ; v1@5342,2651 ccw(c5342,2713.77) 5386.38,2669.38
NetP3_4: P3.4 R11.2 R22.1 | length 482.9
  Top Layer w20: 5211.28,2734 5355,2734 5393,2696 5393,2565 5370,2542 R22.1@5337,2542 ; 5287.19,2734 cw(c5287.19,2674.91) P3.4@5328.98,2716.69 ; P3.4@5339.5,2724.22 cw(c5344.9,2677.3) 5378.3,2710.7
NetR14_1: R14.1 U2.4 | length 63.7
  Top Layer w20: U2.4 5254.79,3534.79 R14.1
NetR20_2: R20.2 U3.44 | length 87.5
  Top Layer w7: U3.44 4704.86,3491.13 R20.2 ; 4708.26,3494.53 cw(c4715.72,3487.07) R20.2@4715.72,3497.63
NetR22_2: R22.2 U5.16 | length 170.2
  Top Layer w20: v1@5294.72,2511.28 R22.2
  Bottom Layer w20: U5.16@5216,2551 5255,2551 v1(5295,2511) ; U5.16@5245.67,2536.14 cw(c5245.67,2477.74) v1@5286.96,2519.04
NetR23_2: R23.2 U5.15 | length 158.4
  Top Layer w20: v1@5289.46,2631.46 cw(c5273.69,2615.69) 5296,2615.69 ; R23.2@5296,2600 v1@5296,2632
  Bottom Layer w20: U5.15@5224,2636 5292,2636 ccw(c5292,2588.25) U5.15@5255.95,2619.57
  other v1: 5293,2635
NetR35_2: R35.2 U3.29 | length 814.7
  Top Layer w7: U3.29 4867.67,3301.33 4881,3288 v1@4881,3249 ; v1@4872.87,3255.13 ccw(c4853.24,3274.76) 4881,3274.76 ccw(c4908.76,3274.76) v1@4889.13,3255.13
  Top Layer w12: v1@5254.64,3596.36 ccw(c5244.1,3606.9) 5259,3606.9 ; v1@5259,3592 5259,3619 ; R35.2@5259,3616.56 ccw(c5287.56,3616.56) v1@5267.36,3596.36
  Bottom Layer w12: v1@4880,3248 4969,3337 5051,3337 5259,3545 v1@5259,3590 ; v1@4881,3256 ccw(c4881,3272.9) 4892.95,3260.95 ; v1@4890,3247 cw(c4916.56,3247) 4897.78,3265.78 ; v1@5254.64,3583.64 cw(c5244.1,3573.1) 5259,3573.1 ; 5259,3563.44 cw(c5287.56,3563.44) v1@5267.36,3583.64
  other v1: 4881,3247 5261,3590
NetR36_1: R36.1 U3.17 | length 1194
  Top Layer w7: U3.17 4704.86,3125.14 ; v1@4712.5,3106.21 ccw(c4686.4,3106.68) 4704.86,3125.14 ; v1@4723.79,3117.5 cw(c4723.32,3143.6) 4704.86,3125.14 ; v1(4724,3106) 4704.86,3125.14
  Top Layer w12: v1@5332.64,3595.36 ccw(c5314.86,3613.14) R36.1@5340,3613.14 ; v1@5340,3590 5340,3619 ; 5340,3608.31 ccw(c5358.31,3608.31) v1@5345.36,3595.36
  Bottom Layer w12: v1@4721.88,3103.88 ccw(c4738.49,3120.49) 4738.49,3097 ; v1(4724,3106) 4724,3104 4731,3097 4897,3097 4968,3168 4968,3245 5029,3306 5066,3306 5339,3579 v1(5339,3589) ; v1@4730.36,3112.36 ccw(c4767.46,3149.46) 4767.46,3097 ; 5316.56,3556.56 ccw(c5284.13,3589) v1@5330,3589
NRST: C11.2 R1.1 U3.7 | length 197.8
  Top Layer w7: R1.1 4460,3264.94 4510.17,3315.11 U3.7 ; 4500.4,3305.34 ccw(c4489.68,3316.06) C11.2@4504.84,3316.06
OUT: P1.3 R35.1 | length 191
  Top Layer w12: P1.3@5243.03,3743.03 cw(c5202.06,3702.06) 5260,3702.06 cw(c5317.94,3702.06) P1.3@5276.97,3743.03 ; R35.1 P1.3
OUT1: P1.4 R36.2 | length 327.2
  Top Layer w12: R36.2@5340,3658.3 cw(c5455.54,3658.3) P1.4@5376.43,3742.51 ; R36.2 5340,3740 P1.4 ccw(c5403.43,3713.77) 5340,3713.77 ; 5340,3686.03 cw(c5429.49,3686.03) P1.4@5368.22,3751.25
PWM_O: P5.2 U3.41 | length 1157.3
  Top Layer w7: U3.41 4746.2,3453.2 4756,3463 v1@4854,3463 ; 4818.75,3463 ccw(c4818.75,3511.25) v1@4852.87,3477.13 ; 4835.65,3463 ccw(c4835.65,3494.35) v1@4857.82,3472.18
  Bottom Layer w10: P5.2@4360,3735 cw(c4360,3674.64) 4402.68,3717.32 cw(c4445.36,3760) P5.2@4385,3760 ; P5.2@4360,3745 cw(c4360,3708.79) 4385.61,3734.39 cw(c4411.21,3760) P5.2@4375,3760 ; P5.2 4411,3709 4837,3709 4883,3663 4883,3489 4863,3469 v1(4861,3469) ; v1@4861,3479 ccw(c4861,3507.97) 4881.49,3487.49 ; v1@4871,3469 cw(c4890.31,3469) 4876.66,3482.66
PWM_O_1: P5.1 U3.42 | length 1188.1
  Top Layer w7: U3.42 4732.42,3463.42 4745,3476 4805,3476 v1(4829,3500) ; v1@4817.5,3500 cw(c4789.74,3500) 4809.37,3480.37 cw(c4829,3460.74) v1@4829,3488.5
  Bottom Layer w10: P5.1@4260,3735 cw(c4260,3674.64) 4302.68,3717.32 cw(c4345.36,3760) P5.1@4285,3760 ; P5.1@4260,3745 cw(c4260,3708.79) 4285.61,3734.39 cw(c4311.21,3760) P5.1@4275,3760 ; P5.1 4334,3686 4823,3686 4859,3650 4859,3530 v1(4829,3500) ; v1@4829,3510 ccw(c4829,3534.14) 4846.07,3517.07 ccw(c4863.14,3500) v1@4839,3500
RED_LED: R30.1 U3.11 | length 1155.6
  Top Layer w7: v1@4397,3121 4489,3213 4567,3213 4581,3227 4581,3250 4590.99,3259.99 U3.11 ; v1@4404.5,3113 cw(c4441.92,3113) 4415.46,3139.46 ; v1@4411.5,3113 cw(c4465.82,3113) 4427.41,3151.41
  Top Layer w12: v1(4434,2520) R30.1 ; v1@4440.36,2513.64 cw(c4455.73,2498.27) 4455.73,2520 cw(c4455.73,2541.73) v1@4440.36,2526.36
  Bottom Layer w12: v1@4393.64,3106.64 cw(c4378.27,3091.27) 4400,3091.27 cw(c4421.73,3091.27) v1@4406.36,3106.64 ; v1(4400,3113) 4400,3060 4459,3001 4459,2832 4394,2767 4394,2560 v1(4434,2520) ; v1@4425,2520 ccw(c4403.27,2520) 4418.64,2535.36 ccw(c4434,2550.73) v1@4434,2529
SWCLK: P2.3 U3.37 | length 975.5
  Top Layer w7: U3.37@4801.31,3435.32 U3.37 v1@4876,3427.32 ; 4845.06,3427.32 cw(c4845.06,3395.06) v1@4867.87,3417.87 ; 4851.41,3427.32 ccw(c4851.41,3450.59) v1@4867.87,3434.13
  Bottom Layer w10: P2.3@4560,3595 cw(c4560,3486.36) 4636.82,3563.18 ; P2.3@4560,3605 cw(c4560,3520.5) 4619.75,3580.25 ; P2.3@4560,3615 cw(c4560,3554.64) 4602.68,3597.32 ; P2.3 4580,3620 4865,3335 4896,3335 4920,3359 4920,3400 4894,3426 ; v1@4882.23,3418.18 cw(c4891.96,3405.96) 4903,3417 ; v1@4884.49,3420.72 cw(c4894,3414.8) 4894,3426 ; v1@4884.49,3431.28 ccw(c4894,3437.2) 4894,3426 ; 4895.08,3424.92 ccw(c4884.94,3414.78) v1(4876,3426) 4894,3426
SWDIO: P2.2 U3.34 | length 507.5
  Top Layer w7: U3.34 v1@4871.77,3370.23 ; U3.34@4849.27,3370.23 cw(c4849.27,3338.27) v1@4871.87,3360.87 ; 4855.2,3370.23 ccw(c4855.2,3393.8) v1@4871.87,3377.13
  Bottom Layer w12: P2.2@4654.8,3596.57 cw(c4651.42,3581.36) 4667,3581.36 cw(c4695.41,3581.36) P2.2@4676.21,3602.31 ; P2.2@4667,3625 4667,3582 v1(4880,3369) ; v1@4871,3369 ccw(c4849.27,3369) 4864.64,3384.36 ccw(c4880,3399.73) v1@4880,3378
USART2_RX: R11.1 U3.13 | length 1599.9
  Top Layer w7: v1@4477.87,3124.13 ccw(c4458.24,3143.76) 4486,3143.76 ccw(c4513.76,3143.76) v1@4494.13,3124.13 ; v1(4486,3116) 4486,3146 4523,3183 4633,3183 4649.74,3199.74 U3.13
  Top Layer w10: v1@4497,2628 4640,2628 4706,2694 4867,2694 4913,2740 R11.1 ; v1@4504.07,2622.93 cw(c4516.31,2610.69) 4516.31,2628 ; v1@4504.07,2637.07 ccw(c4525.97,2658.97) 4525.97,2628
  Bottom Layer w10: v1@4478.93,3108.93 cw(c4461.86,3091.86) 4486,3091.86 cw(c4510.14,3091.86) v1@4493.07,3108.93 ; v1(4486,3116) 4486,3065 4513,3038 4513,2646 ; v1(4497,2630) 4513,2646 ; v1@4497.47,2639.99 ccw(c4498.43,2660.56) 4513,2646 ; v1@4506.99,2630.47 cw(c4527.56,2631.43) 4513,2646
USART2_TX: R12.1 U3.12 | length 1641.1
  Top Layer w7: v1(4442,3116) 4442,3127 4513,3198 4607,3198 4620.2,3211.2 U3.12 ; v1@4446.5,3116 cw(c4483.92,3116) 4457.46,3142.46 ; v1@4453.5,3116 cw(c4507.82,3116) 4469.41,3154.41
  Top Layer w10: v1(4482,2672) 4640,2672 4688,2720 4835,2720 4914,2799 5165,2799 ; v1@4489.07,2664.93 cw(c4506.14,2647.86) 4506.14,2672 cw(c4506.14,2696.14) v1@4489.07,2679.07
  Bottom Layer w10: v1@4434.93,3108.93 cw(c4417.86,3091.86) 4442,3091.86 cw(c4466.14,3091.86) v1@4449.07,3108.93 ; v1(4442,3116) 4442,3057 4482,3017 v1(4482,2672) ; v1@4474.93,2679.07 ccw(c4457.86,2696.14) 4482,2696.14 ccw(c4506.14,2696.14) v1@4489.07,2679.07
USART_RX: P2.5 U3.2 | length 617.5
  Top Layer w7: v1(4562,3454) 4577,3439 4577,3395 4587.99,3384.01 U3.2
  Bottom Layer w12: P2.5@4344.17,3601.96 cw(c4313.48,3567) 4360,3567 ; P2.5 4360,3567 ; P2.5@4375.83,3601.96 ccw(c4406.52,3567) 4360,3567 ; v1(4562,3454) 4562,3457 4595,3490 4595,3527 4577,3545 4382,3545 4360,3567 ; v1@4562,3463 ccw(c4562,3477.49) 4572.24,3467.24 ; v1@4571,3454 cw(c4599.97,3454) 4579.49,3474.49
USART_TX: P2.6 U3.1 | length 651.1
  Top Layer w7: v1@4558,3498.5 cw(c4558,3470.74) 4577.63,3490.37 cw(c4597.26,3510) v1@4569.5,3510 ; v1(4558,3510) 4620.2,3447.8 U3.1
  Bottom Layer w12: P2.6@4245.93,3600.56 cw(c4225.98,3573) 4260,3573 ; P2.6 4260,3573 ; P2.6@4274.07,3600.56 ccw(c4294.02,3573) 4260,3573 ; v1@4551.64,3503.64 ccw(c4536.27,3488.27) 4536.27,3510 ccw(c4536.27,3531.73) v1@4551.64,3516.36 ; v1(4558,3510) 4323,3510 4260,3573
XTALA: C13.2 U3.5 Y1.1 | length 421.6
  Top Layer w7: Y1.1@4492.68,3460.16 ccw(c4462.26,3490.57) 4505.28,3490.57 ; Y1.1@4497.63,3455.21 ccw(c4479.16,3473.67) 4505.28,3473.67 ; Y1.1@4501.31,3463.74 ccw(c4501.3,3467.72) 4505.28,3467.72 ; 4505.28,3471.56 ccw(c4521.4,3471.56) Y1.1@4510,3460.16 ; C13.2 4505.28,3467.72 ; Y1.1@4508.5,3461.43 cw(c4513.03,3467.72) 4505.28,3467.72 ; Y1.1@4509.21,3439.25 cw(c4509.21,3380.01) 4551.1,3421.9 ; Y1.1@4509.21,3446.25 cw(c4509.21,3403.9) 4539.15,3433.85 ; Y1.1@4509.21,3453.25 cw(c4509.21,3427.8) 4527.2,3445.8 ; U3.5 4592.33,3342.67 4560,3375 4560,3413 4505.28,3467.72
XTALB: C14.2 U3.6 Y1.3 | length 384.8
  Top Layer w7: C14.2 4358.72,3356 4535,3356 4562.11,3328.89 U3.6 ; C14.2@4344.37,3374.72 ccw(c4354.93,3374.72) 4347.47,3367.26 ; Y1.3@4410,3379.84 cw(c4389.09,3358.93) 4418.66,3358.93 cw(c4448.23,3358.93) Y1.3@4427.32,3379.84 ; 4418.66,3357.66 Y1.3
pads on no net: U3.3 U3.4 U3.20 U3.21 U3.25 U3.26 U3.27 U3.28 U3.30 U3.31 U3.32 U3.33 U3.38 U3.39 U3.40 U3.43 U3.45 U3.46 U5.1 U5.2 Y1.2 Y1.4

## Polygon pours and split planes (outlines as drawn)
GND on Top Layer "Top Layer-No Net" (solid, remove dead copper, pour order 1000): 4183.19,3835.97 5441.93,3835.97 5441.93,2470.97 5426.93,2455.97 4183.19,2455.97 4183.19,3835.97
GND on Bottom Layer "Top Layer-No Net" (solid, remove dead copper, pour order 1001): 4187.19,3833.29 5445.93,3833.29 5445.93,2453.29 4187.19,2453.29 4187.19,3826.29

## Keep-outs
Keep-Out Layer:
  circle w12: c5366.69,3310 r43.31
  circle w12: c4278.69,2546 r43.31
  lines w20: 4191.26,2455 5450,2455 5450,3835 4191.26,3835 4191.26,2455

## Other copper
Top Layer:
  pour cut-out: 4385.04,3477.24 4385.8,3478 4527,3478 4527,3371 4528.24,3369.76 4385.04,3369.76
  pour cut-out: 4944.29,3509.68 5073.69,3509.68 5074,3510 5074,3339 4945.37,3339 4944.29,3340.08
  pour cut-out: 5451,3836 5451,3666 5447,3662 5006,3662 5006,3836
Bottom Layer:
  pour cut-out: 4545,3000 5290,3000 5290,2457 5292,2455 4545,2455
  pour cut-out: 4385,3476 4386,3477 4529,3477 4529,3372.98 4531.85,3370.13 4529.72,3368 4385,3368
  pour cut-out: 4939,3510 5074,3510 5075,3509 5075,3338 4941,3338 4939,3340
  pour cut-out: 5450,3835 5450,3665 5446,3661 5005,3661 5005,3835

## Silkscreen, mask and mechanical layers (free items; w line width, h text height)
Top Overlay:
  circle w20: c4590.6,3461.7 r11.25
  circle w20: c4534,3480 r10.73
  region: 4245,2935.36 4245.64,2936 4309,2936 4309,2707 4245,2707
  region: 4314,3256.36 4314.64,3257 4378,3257 4378,3028 4314,3028
  region: 5374.05,3585.36 5374.69,3586 5438.05,3586 5438.05,3442 5374.05,3442
  region: 5261,3215.36 5261.64,3216 5325,3216 5325,3072 5261,3072
  lines w20: 5027,3562 5027,3610
  text "ADC3" at 4621,3696 h40
  text "GND" at 4740,3696 h40
  text "ADC2" at 4514,3695 h40
  text "PW" at 4334,3694 h40
  text "ADC1" at 4413,3694 h40
  text "PW-1" at 4236,3693 h40
  text "O1" at 5291,3676 h60
  text "G" at 5096,3673 h60
  text "O" at 5190,3673 h60
  text "V" at 4992,3668 h60
  text "DIO" at 4722,3612 h40 r90
  text "TX" at 4325,3611 h40 r90
  text "RX" at 4422,3609 h40 r90
  text "CLK" at 4621,3604 h40 r90
  text "3.3V" at 4818,3600 h60
  text "GND" at 4521,3599 h40 r90
  text "Phosense" at 4829,2928 h60
  text "V" at 4374,2891 h50 r90
  text "PHO3235" at 4831,2865 h60
  text "G" at 4244,2822 h50 r90
  text "IF" at 4251,2726 h50 r90
  text "EXIST Board V0.3" at 4742,2469 h60
Bottom Overlay:
  region: 4591,3173 5238,3173 5238,2964 4591,2964
  text "GND" at 4498,3556 h40
  text "CLK" at 4590.95,3554.12 h40
  text "5-15V" at 5161,3554 h60
  text "DIO" at 4684,3553 h40
  text "TX" at 4282.25,3550.75 h40
  text "RX" at 4375.86,3551.14 h40
  text "3.3V" at 4825,3538 h60
  text "3.6V" at 5066,3248 h60
  text "GND" at 5360,3223 h60
  text "3.3V_B" at 4587,3193 h60
  text "3.3V" at 4347,2960 h60

## Dimensions
4191.26,3835 to 5450,3835 on Mechanical 1
5450,3835 to 5450,2455 on Mechanical 1

## Text inside footprints (layer, text, board x,y; h text height)
D5: Top Overlay "+" at 4998,3801 h39.37 r180
XBR100-02/300-02: Top Overlay "V" at 4442,3199 h50 r90; Top Overlay "G" at 4303,3116 h50 r90; Top Overlay "IF" at 4307,3014 h50 r90